# EAGLE board led-er-v2 copy (EAGLE 7.2.0)
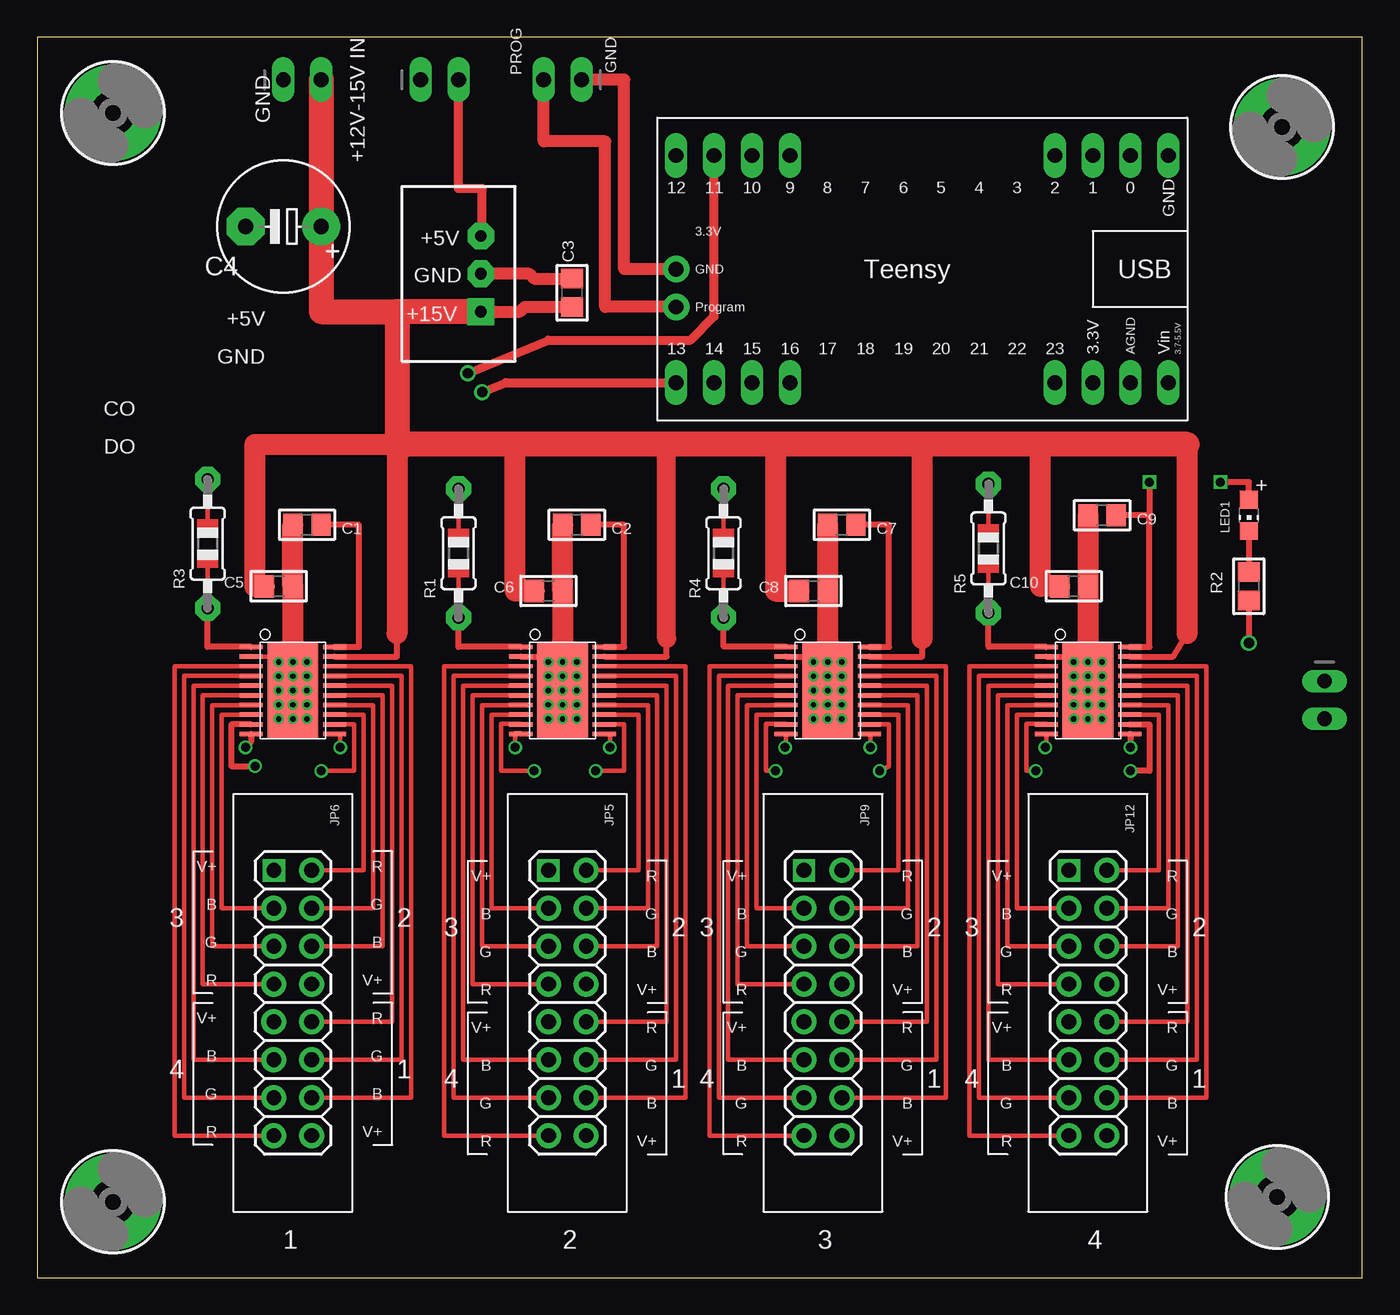
[diagram p0: board, top side]
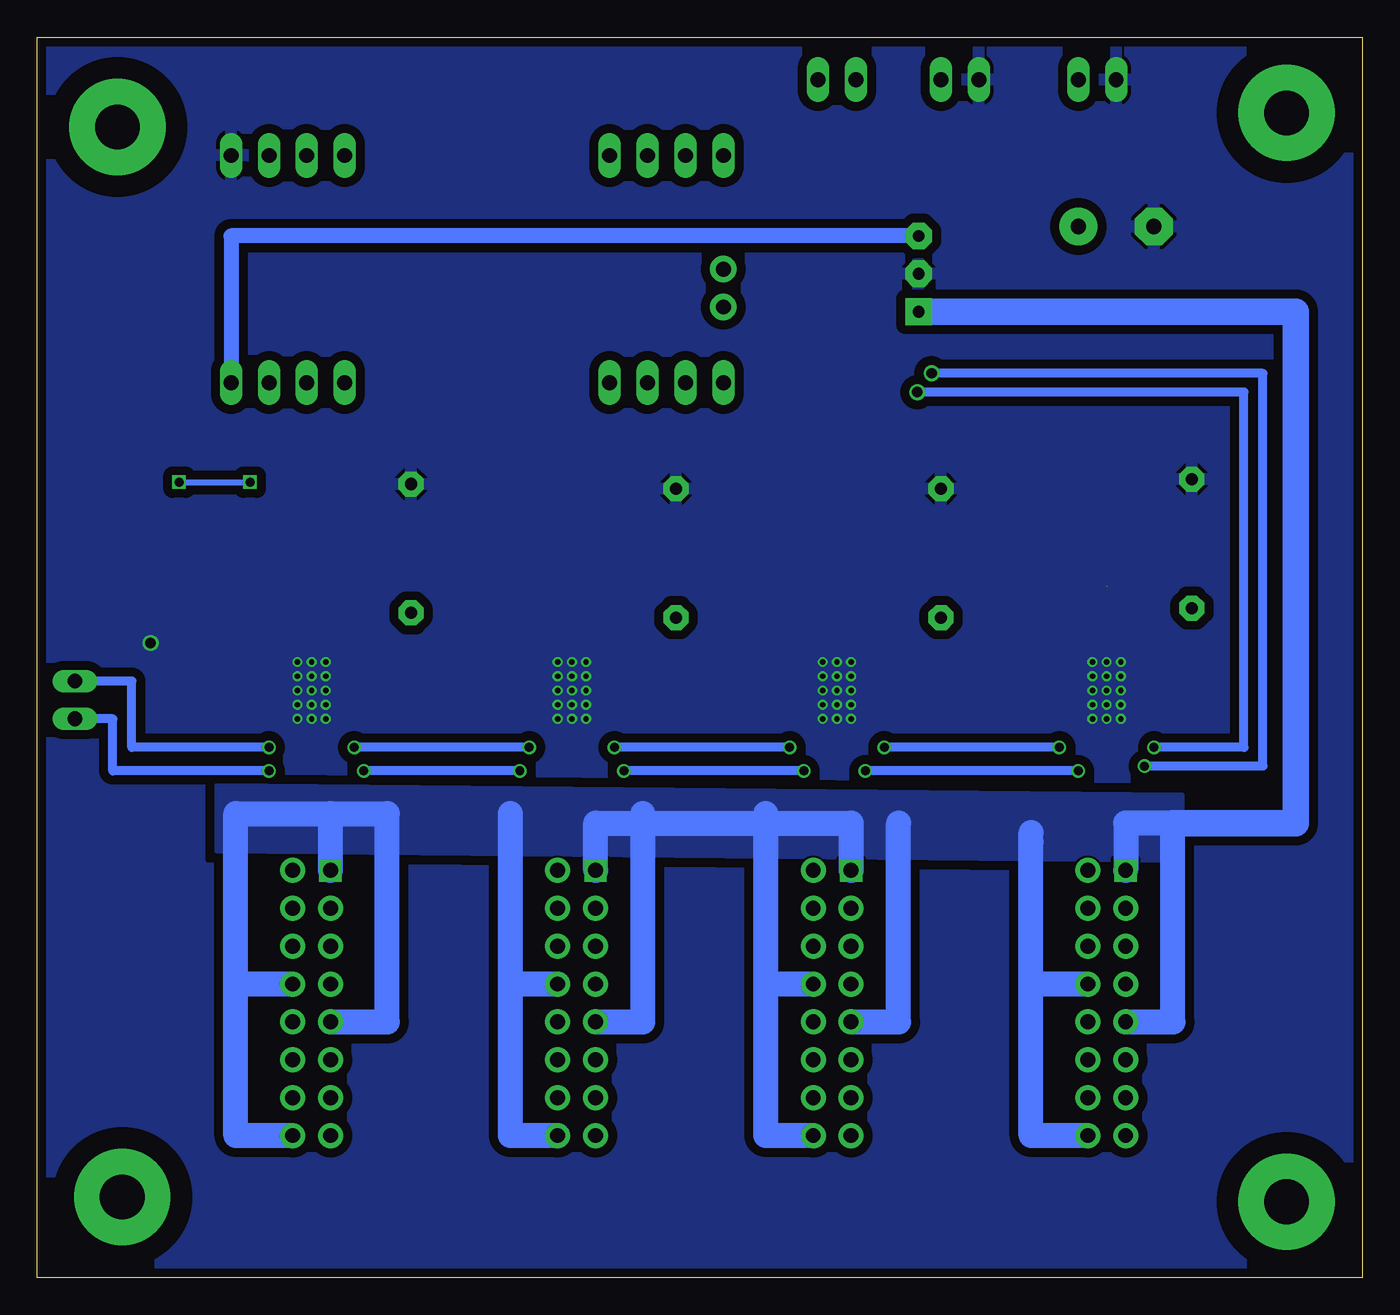
[diagram p1: board, bottom side, seen from below]

Size 88.89 x 83.17 mm. Coordinates in mm from the lower left corner, seen from the top.
Outline: 0,0 88.89,0 88.89,83.17 0,83.17 0,0
Copper layers (1*16): Top 0.035mm / dielectric 1.5mm / Bottom 0.035mm
Design rules "SeeedStudio_2layer_DRU_no_angle_20140221": minimum track width 6mil, minimum drill 12mil, track to track 6mil, track to pad 6mil, pad to pad 6mil, via to via 6mil, smd to smd 0mil, copper to edge 10mil, drill to drill 10mil, minimum pad ring 10mil, minimum via ring 6mil, stop-mask expansion 2mil, vias tented up to drill 100mil, thermal gap 10mil
tRestrict: area 10.8,14 to 16.5,17.8; area 19.7,16.5 to 23.5,20.3; area 28.6,14 to 33.7,17.8; area 38.7,16.5 to 41.9,20.3; area 47.6,14 to 52.1,17.8; area 57.1,16.5 to 61,20.3; area 66,14 to 71.1,17.8; area 75.6,16.5 to 80.6,20.3; area 25.8,10.4 to 26.5,12.7; area 44.3,10.5 to 45.5,12.6; area 63,10.6 to 63.9,12.8; area 15.2,36.6 to 15.8,37.7; 1 more areas

## Footprints (pad centres in the part's own frame; a part is rotated, then mirrored left to right if it is on the bottom)
0805 = smd 1.3 x 1.5: 1 -0.95,0; 2 0.95,0
E5-8,5 = drill 1.016 pad 2.54: + -2.54,0 | drill 1.016 pad 2.54 octagon: - 2.54,0
HTSSOP20DAP = smd 0.3 x 1.55: 1 -2.925,-2.8; 2 -2.275,-2.8; 3 -1.625,-2.8; 4 -0.975,-2.8; 5 -0.325,-2.8; 6 0.325,-2.8; 7 0.975,-2.8; 8 1.625,-2.8; 9 2.275,-2.8; 10 2.925,-2.8; 11 2.925,2.8; 12 2.275,2.8; 13 1.625,2.8; 14 0.975,2.8; 15 0.325,2.8; 16 -0.325,2.8; 17 -0.975,2.8; 18 -1.625,2.8; 19 -2.275,2.8; 20 -2.925,2.8 | smd 6.5 x 3.4: EXP 0,0
2X08 = drill 1 square: P1 -8.89,-1.27 | drill 1 pad 1.676: P2 -6.35,-1.27; P3 -3.81,-1.27; P4 -1.27,-1.27; P5 1.27,-1.27; P6 3.81,-1.27; P7 6.35,-1.27; P8 8.89,-1.27; P9 -8.89,1.27; P10 -6.35,1.27; P11 -3.81,1.27; P12 -1.27,1.27; P13 1.27,1.27; P14 3.81,1.27; P15 6.35,1.27; P16 8.89,1.27
1X02_OVAL = drill 1 long: 1 -1.27,0; 2 1.27,0
CHIP-LED0805 = smd 1.2 x 1.2: A 0,-1.05; C 0,1.05
0805-THM-7 = drill 0.813 pad 1.676 octagon: 1 -4.318,0; 2 4.318,0
TSR-1 = drill 0.8 pad 1.8 square: 1 -2.54,-1.5 | drill 0.8 pad 1.8 octagon: 2 0,-1.5; 3 2.54,-1.5
MOUNTINGHOLE_3.0_PLATED = drill 3 pad 6.452: P$1 0,0
TEENSY_LEDER = drill 1 pad 1.422 long: 0 12.7,7.62; 1 10.16,7.62; 2 7.62,7.62; 3.3V 10.16,-7.62; 9 -10.16,7.62; 10 -12.7,7.62; 11 -15.24,7.62; 12 -17.78,7.62; 13 -17.78,-7.62; 14 -15.24,-7.62; 15 -12.7,-7.62; 16 -10.16,-7.62; 23 7.62,-7.62; AGND 12.7,-7.62; GND 15.24,7.62; VIN 15.24,-7.62 | drill 1 pad 1.778: GND2 -17.78,0; PROG -17.78,-2.54

## Placement (x,y rotation side)
C1  10uF/16V  [0805]  18.1,50.48 180 top
C2  10uF/16V  [0805]  36.2,50.48 180 top
C3  10uF/16V  [0805]  35.88,66.04 90 top
C4  220uF+  [E5-8,5]  16.51,70.48 180 top
C5  1uF/50V  [0805]  16.19,46.35 0 top
C6  1uF/50V  [0805]  34.29,46.04 0 top
C7  10uF/16V  [0805]  53.98,50.48 180 top
C8  1uF/50V  [0805]  52.07,46.04 0 top
C9  10uF/16V  [0805]  71.44,51.12 180 top
C10  1uF/50V  [0805]  69.53,46.35 0 top
IC1  TLC59711  [HTSSOP20DAP]  17.14,39.37 270 top
IC2  TLC59711  [HTSSOP20DAP]  35.24,39.37 270 top
IC3  TLC59711  [HTSSOP20DAP]  53.02,39.37 270 top
IC4  TLC59711  [HTSSOP20DAP]  70.48,39.37 270 top
JP5  [2X08]  35.56,18.41 270 top
JP6  [2X08]  17.14,18.41 270 top
JP9  [2X08]  52.7,18.41 270 top
JP12  [2X08]  70.48,18.41 270 top
JP_5V  [1X02_OVAL]  26.99,80.33 0 top
JP_15VIN  [1X02_OVAL]  17.78,80.33 0 top
JP_15VIN1  [1X02_OVAL]  86.36,38.73 270 top
JP_PROG  [1X02_OVAL]  35.24,80.33 180 top
LED1  Green  [CHIP-LED0805]  81.28,51.12 180 top
R1  3.3K  [0805-THM-7]  28.26,48.58 90 top
R2  470  [0805]  81.28,46.35 90 top
R3  3.3K  [0805-THM-7]  11.43,49.21 90 top
R4  3.3K  [0805-THM-7]  46.04,48.58 90 top
R5  3.3K  [0805-THM-7]  63.82,48.9 90 top
TSR1-2450  TSR1-2450  [TSR-1]  28.26,67.31 90 top
U$1  MOUNTINGHOLE  [MOUNTINGHOLE_3.0_PLATED]  83.5,77.15 0 top
U$2  MOUNTINGHOLE  [MOUNTINGHOLE_3.0_PLATED]  5.08,5.08 0 top
U$3  MOUNTINGHOLE  [MOUNTINGHOLE_3.0_PLATED]  83.19,5.4 0 top
U$4  MOUNTINGHOLE  [MOUNTINGHOLE_3.0_PLATED]  5.08,78.11 0 top
U$5  TEENSY_LEDER  [TEENSY_LEDER]  60.64,67.63 0 top

## Library data of the parts
C1-C3 C5-C10 JP_5V JP_15VIN JP_15VIN1 JP_PROG R2 U$1-U$4 = microbuilder
C4 IC1-IC4 LED1 R1 R3-R5 = adafruit
JP5 JP6 JP9 JP12 U$5 = Andrews
TSR1-2450 = SteelCaveRobotics-Power

## Nets
+15V: C3.1 C4.+ C5.1 C6.1 C8.1 C10.1 IC1.19 IC2.19 IC3.19 IC4.19 JP5.P1 JP5.P5 JP5.P12 JP5.P16 JP6.P1 JP6.P5 JP6.P12 JP6.P16 JP9.P1 JP9.P5 JP9.P12 JP9.P16 JP12.P1 JP12.P5 JP12.P12 JP12.P16 JP_15VIN.2 TSR1-2450.1
GND: C1.2 C2.2 C3.2 C4.- C5.2 C6.2 C7.2 C8.2 C9.2 C10.2 IC1.2 IC1.EXP IC2.2 IC2.EXP IC3.2 IC3.EXP IC4.2 IC4.EXP JP_5V.1 JP_15VIN.1 R1.2 R2.1 R3.2 R4.2 R5.2 TSR1-2450.2 U$5.GND
JP1: JP_5V.2 TSR1-2450.3 U$5.VIN
N$1: LED1.C R2.2
N$2: IC1.1 R3.1
N$3: IC1.3 JP6.P8
N$4: IC1.4 JP6.P7
N$5: IC1.5 JP6.P6
N$6: IC1.6 JP6.P4
N$7: IC1.7 JP6.P3
N$8: IC1.8 JP6.P2
N$9: IC1.13 JP6.P9
N$10: IC1.14 JP6.P10
N$11: IC1.15 JP6.P11
N$12: IC1.16 JP6.P13
N$13: IC1.17 JP6.P14
N$14: IC1.18 JP6.P15
N$15: IC2.1 R1.1
N$16: IC2.3 JP5.P8
N$17: IC2.4 JP5.P7
N$18: IC2.5 JP5.P6
N$19: IC2.6 JP5.P4
N$20: IC2.7 JP5.P3
N$21: IC2.8 JP5.P2
N$22: IC2.13 JP5.P9
N$23: IC2.14 JP5.P10
N$24: IC2.15 JP5.P11
N$25: IC2.16 JP5.P13
N$26: IC2.17 JP5.P14
N$27: IC2.18 JP5.P15
N$28: IC3.1 R4.1
N$29: IC3.3 JP9.P8
N$30: IC3.4 JP9.P7
N$31: IC3.5 JP9.P6
N$32: IC3.6 JP9.P4
N$33: IC3.7 JP9.P3
N$34: IC3.8 JP9.P2
N$35: IC3.13 JP9.P9
N$36: IC3.14 JP9.P10
N$37: IC3.15 JP9.P11
N$38: IC3.16 JP9.P13
N$39: IC3.17 JP9.P14
N$40: IC3.18 JP9.P15
N$41: IC4.1 R5.1
N$42: IC4.3 JP12.P8
N$43: IC4.4 JP12.P7
N$44: IC4.5 JP12.P6
N$45: IC4.6 JP12.P4
N$46: IC4.7 JP12.P3
N$47: IC4.8 JP12.P2
N$48: IC4.13 JP12.P9
N$49: IC4.14 JP12.P10
N$50: IC4.15 JP12.P11
N$51: IC4.16 JP12.P13
N$52: IC4.17 JP12.P14
N$53: IC4.18 JP12.P15
N$54: JP_PROG.1 U$5.GND2
N$55: JP_PROG.2 U$5.PROG
N$56: C1.1 IC1.20
N$57: C7.1 IC3.20
N$58: C2.1 IC2.20
N$59: IC4.11 JP_15VIN1.1
N$60: IC4.12 JP_15VIN1.2
SCKI: IC1.10 U$5.13
SCKO1: IC1.11 IC2.10
SCKO2: IC2.11 IC3.10
SCKO3: IC3.11 IC4.10
SDTI: IC1.9 U$5.11
SDTO1: IC1.12 IC2.9
SDTO2: IC2.12 IC3.9
SDTO3: IC3.12 IC4.9
VCC: C9.1 IC4.20 LED1.A

## Tracks (layer width: path | path; a pad name or v marks a point on that pad's centre or on a via)
+15V
  Top 0.406: IC1.19 24.13,41.65 24.13,43.18 | IC2.19 42.23,41.65 42.23,42.86 | IC3.19 59.37,41.65 59.37,42.86 | IC4.19 76.2,41.65 77.15,43.18
  Top 0.813: 24.13,64.77 32.38,64.77 32.7,65.09 35.24,65.09 C3.1
  Top 1.27: 42.23,42.86 42.23,55.88
  Top 1.422: 24.13,55.88 24.13,43.18 | C10.1 67.31,46.35 67.31,55.88 | 59.05,55.88 49.53,55.88 49.53,46.04 C8.1 | 59.37,42.86 59.37,55.88 | C6.1 32.07,46.04 32.07,55.88 | C5.1 14.61,46.35 14.61,55.88 24.77,55.88 | 77.15,43.18 77.15,55.88
  Top 1.676: 77.15,55.88 67.31,55.88 59.37,55.88 59.05,55.88 42.23,55.88 32.07,55.88 24.77,55.88 24.13,55.88 24.13,64.77 | JP_15VIN.2 C4.+ 19.05,64.77 24.13,64.77 | TSR1-2450.1 24.13,64.77
  Bottom 1.676: JP6.P1 15.88,30.48 12.7,30.48 12.7,17.14 JP6.P5 | JP6.P12 22.23,19.68 22.23,29.21 | JP6.P16 22.23,9.53 22.23,29.84 | JP5.P12 40.01,19.68 | 40.01,19.68 40.01,31.11 | JP5.P16 40.01,9.53 40.01,19.68 | JP5.P5 31.11,17.14 31.11,30.48 | JP9.P12 57.15,19.68 | 57.15,19.68 57.15,31.11 | JP9.P16 57.15,9.53 57.15,19.68 | JP9.P5 48.26,17.14 48.26,31.11 | JP12.P12 75.56,19.68 | 75.56,19.68 75.56,31.11 69.22,31.11 | 69.22,31.11 65.41,31.11 65.41,17.14 JP12.P5 | JP12.P16 75.56,9.53 75.56,19.68 | JP12.P1 69.22,31.11 | JP9.P1 51.44,30.48 34.29,30.48 JP5.P1
  Bottom 1.778: 12.7,30.48 4.45,30.48 4.45,64.77 TSR1-2450.1
  pour Bottom: 12.06,32.38 12.06,27.94 76.83,28.57 76.83,33.02
GND  (via drill 0.36, 0.7)  (1 unrouted)
  Top 0.305: 33.92,41.65 v34.29,41.27 | IC1.2 16.19,41.65 v16.19,41.27
  Top 0.406: IC2.2 33.92,41.65 | R2.1 v81.28,42.55 | IC3.2 52.07,41.65 v52.07,41.27 | IC4.2 69.53,41.65 v69.53,41.27
  Top 0.813: C3.2 35.24,66.99 33.34,66.99 33.02,67.31 TSR1-2450.2
  Top 1.422: v70.48,41.27 C10.2 C9.2 | v53.02,41.27 C8.2 C7.2 | v35.24,41.27 C6.2 C2.2 | v17.14,41.27 C5.2 C1.2
  other vias: 70.48,39.37 71.44,37.47 70.48,37.47 69.53,37.47 71.44,38.42 70.48,38.42 69.53,38.42 71.44,39.37 69.53,39.37 71.44,40.32 70.48,40.32 69.53,40.32 53.02,39.37 53.98,39.37 52.07,39.37 53.98,38.42 53.02,38.42 52.07,38.42 53.98,37.47 53.02,37.47 52.07,37.47 53.98,40.32 53.02,40.32 52.07,40.32 35.24,39.37 36.2,39.37 34.29,39.37 34.29,38.42 35.24,38.42 36.2,38.42 36.2,40.32 35.24,40.32 34.29,40.32 34.29,37.47 35.24,37.47 36.2,37.47 17.14,39.37 16.19,39.37 18.1,39.37 18.1,40.32 17.14,40.32 16.19,40.32 18.1,41.27 18.1,38.42 17.14,38.42 16.19,38.42 16.19,37.47 17.14,37.47 18.1,37.47 36.2,41.27 53.98,41.27 71.44,41.27 69.53,40.32 35.24,40.32
  pour Bottom (isolate 0.61, rank 2): 0,83.19 0,0 88.9,0 88.9,83.19
JP1
  Top 0.61: TSR1-2450.3 29.84,69.85 29.84,73.03 28.26,73.03 JP_5V.2
  Bottom 1.016: TSR1-2450.3 75.88,69.85 U$5.VIN
N$1
  Top 0.406: LED1.C R2.2
N$2
  Top 0.406: IC1.1 11.43,42.3 R3.1
N$3
  Top 0.305: IC1.3 9.21,40.99 9.21,9.53 JP6.P8
N$4
  Top 0.305: IC1.4 9.84,40.34 9.84,12.06 JP6.P7
N$5
  Top 0.305: IC1.5 10.48,39.7 10.48,14.61 JP6.P6
N$6
  Top 0.305: IC1.6 11.11,39.05 11.11,19.68 JP6.P4
N$7
  Top 0.305: IC1.7 11.75,38.4 11.75,22.23 JP6.P3
N$8
  Top 0.305: IC1.8 12.38,37.74 12.38,24.77 JP6.P2
N$9
  Top 0.305: IC1.13 21.91,37.74 21.91,27.3 JP6.P9
N$10
  Top 0.305: IC1.14 22.54,38.4 22.54,24.77 JP6.P10
N$11
  Top 0.305: IC1.15 23.18,39.05 23.18,22.23 JP6.P11
N$12
  Top 0.305: IC1.16 23.81,39.7 23.81,17.14 JP6.P13
N$13
  Top 0.305: IC1.17 24.45,40.34 24.45,14.61 JP6.P14
N$14
  Top 0.305: IC1.18 25.08,40.99 25.08,12.06 JP6.P15
N$15
  Top 0.406: IC2.1 28.26,42.3 R1.1
N$16
  Top 0.305: IC2.3 27.3,40.99 27.3,9.53 JP5.P8
N$17
  Top 0.305: IC2.4 27.94,40.34 27.94,12.06 JP5.P7
N$18
  Top 0.305: IC2.5 28.57,39.7 28.57,14.61 JP5.P6
N$19
  Top 0.305: IC2.6 29.21,39.05 29.21,19.68 JP5.P4
N$20
  Top 0.305: IC2.7 29.84,38.4 29.84,22.23 JP5.P3
N$21
  Top 0.305: IC2.8 30.48,37.74 30.48,24.77 JP5.P2
N$22
  Top 0.305: IC2.13 40.32,37.74 40.32,27.3 JP5.P9
N$23
  Top 0.305: IC2.14 40.96,38.4 40.96,24.77 JP5.P10
N$24
  Top 0.305: IC2.15 41.59,39.05 41.59,22.23 JP5.P11
N$25
  Top 0.305: IC2.16 42.23,39.7 42.23,17.14 JP5.P13
N$26
  Top 0.305: IC2.17 42.86,40.34 42.86,14.61 JP5.P14
N$27
  Top 0.305: IC2.18 43.5,40.99 43.5,12.06 JP5.P15
N$28
  Top 0.305: IC3.1 50.2,42.31
  Top 0.406: 50.2,42.31 46.04,42.31 R4.1
N$29
  Top 0.305: IC3.3 45.09,40.99 45.09,9.53 JP9.P8
N$30
  Top 0.305: IC3.4 45.72,40.34 45.72,12.06 JP9.P7
N$31
  Top 0.305: IC3.5 46.35,39.7 46.35,14.61 JP9.P6
N$32
  Top 0.305: IC3.6 46.99,39.05 46.99,19.68 JP9.P4
N$33
  Top 0.305: IC3.7 47.62,38.4 47.62,22.23 JP9.P3
N$34
  Top 0.305: IC3.8 48.26,37.74 48.26,24.77 JP9.P2
N$35
  Top 0.305: IC3.13 57.78,37.74 57.78,27.3 JP9.P9
N$36
  Top 0.305: IC3.14 58.42,38.4 58.42,24.77 JP9.P10
N$37
  Top 0.305: IC3.15 59.05,39.05 59.05,22.23 JP9.P11
N$38
  Top 0.305: IC3.16 59.69,39.7 59.69,17.14 JP9.P13
N$39
  Top 0.305: IC3.17 60.33,40.34 60.33,14.61 JP9.P14
N$40
  Top 0.305: IC3.18 60.96,40.99 60.96,12.06 JP9.P15
N$41
  Top 0.406: IC4.1 63.82,42.3 R5.1
N$42
  Top 0.305: IC4.3 62.55,40.99 62.55,9.53 JP12.P8
N$43
  Top 0.305: IC4.4 63.18,40.34 63.18,12.06 JP12.P7
N$44
  Top 0.305: IC4.5 63.82,39.7 63.82,14.61 JP12.P6
N$45
  Top 0.305: IC4.6 64.45,39.05 64.45,19.68 JP12.P4
N$46
  Top 0.305: IC4.7 65.09,38.4 65.09,22.23 JP12.P3
N$47
  Top 0.305: IC4.8 65.72,37.74 65.72,24.77 JP12.P2
N$48
  Top 0.305: IC4.13 75.25,37.74 75.25,27.3 JP12.P9
N$49
  Top 0.305: IC4.14 75.88,38.4 75.88,24.77 JP12.P10
N$50
  Top 0.305: IC4.15 76.52,39.05 76.52,22.23 JP12.P11
N$51
  Top 0.305: IC4.16 77.15,39.7 77.15,17.14 JP12.P13
N$52
  Top 0.305: IC4.17 77.79,40.34 77.79,14.61 JP12.P14
N$53
  Top 0.305: IC4.18 78.42,40.99 78.42,12.06 JP12.P15
N$54
  Top 0.813: U$5.GND2 39.37,67.63 39.37,80.33 JP_PROG.1
N$55
  Top 0.813: U$5.PROG 38.1,65.09 38.1,76.2 33.97,76.2 JP_PROG.2
N$56
  Top 0.406: IC1.20 21.59,42.3 21.59,50.48 C1.1
N$57
  Top 0.406: IC3.20 57.15,42.3 57.15,50.48 C7.1
N$58
  Top 0.406: IC2.20 39.37,42.3 39.37,50.48 C2.1
N$59  (via drill 0.6)
  Top 0.406: IC4.11 73.34,36.45 v73.34,35.56
  Bottom 0.61: v73.34,35.56 82.55,35.56 82.55,40.01 JP_15VIN1.1
N$60  (via drill 0.6)
  Top 0.406: IC4.12 74.61,37.09 74.61,33.97 v73.34,33.97
  Bottom 0.61: v73.34,33.97 83.82,33.97 83.82,37.47 JP_15VIN1.2
SCKI  (via drill 0.6, 0.7)
  Top 0.406: IC1.10 14.35,35.94 v13.97,35.56
  Top 0.61: v29.84,59.37 31.43,60.01 U$5.13
  Bottom 0.61: v13.97,35.56 7.94,35.56 7.94,59.37 v29.84,59.37
SCKO1  (via drill 0.6)
  Top 0.305: IC1.11 20.32,36.45 v20.32,35.56 | 32.07,36.45 IC2.10 32.44,36.51 32.07,36.51 v32.07,35.56
  Bottom 0.61: v20.32,35.56 v32.07,35.56
SCKO2  (via drill 0.6)
  Top 0.305: IC2.11 38.42,36.45 v38.42,35.56 | v50.16,35.56 50.22,35.56 IC3.10
  Bottom 0.61: v38.42,35.56 v50.16,35.56
SCKO3  (via drill 0.6)
  Top 0.305: IC3.11 55.88,36.45 v55.88,35.56 | v67.63,35.56 67.69,35.56 IC4.10
  Bottom 0.61: v55.88,35.56 v67.63,35.56
SDTI  (via drill 0.6, 0.7)
  Top 0.406: IC1.9 13.02,37.09 13.02,34.29 v14.61,34.29
  Top 0.61: v28.89,60.64 34.29,62.87 43.81,62.87 45.4,64.45 U$5.11
  Bottom 0.61: v14.61,34.29 6.67,34.29 6.67,60.64 v28.89,60.64
SDTO1  (via drill 0.6)
  Top 0.305: IC1.12 21.27,37.09 21.27,33.97 v19.05,33.97 | v33.34,33.97 31.11,33.97 31.11,37.15 32.44,37.15 IC2.9
  Bottom 0.61: v19.05,33.97 v33.34,33.97
SDTO2  (via drill 0.6)
  Top 0.305: IC2.12 39.37,37.09 39.37,33.97 v37.47,33.97 | v49.53,33.97 48.9,33.97 48.9,37.15 50.22,37.15 IC3.9
  Bottom 0.61: v37.47,33.97 v49.53,33.97
SDTO3  (via drill 0.6)
  Top 0.305: IC3.12 57.15,37.09 57.15,34.29 v56.52,33.97 | v66.99,33.97 66.36,33.97 66.36,37.15 67.69,37.15 IC4.9
  Bottom 0.61: v56.52,33.97 v66.99,33.97
VCC  (via drill 0.6)
  Top 0.406: IC4.20 74.61,42.3 74.61,51.12 | 74.61,51.12 C9.1 | LED1.A 81.28,53.34 v79.38,53.34 | v74.61,53.34 74.61,51.12
  Bottom 0.406: v79.38,53.34 v74.61,53.34

## Text on the board
tPlace: PROG | +12V-15V IN | GND | GND | +5V | GND | +5V | +15V | GND | CO | DO | V+ | R | V+ | R | V+ | R | V+ | R | 3 | B | G | 2 | B | G | B | G | B | G | 3 | 2 | 3 | 2 | 3 | 2 | G | B | G | B | G | B | G | B | R | V+ | R | V+ | R | V+ | R | V+ | V+ | R | V+ | R | V+ | R | V+ | R | 4 | B | G | 1 | B | G | B | G | B | G | 4 | 1 | 4 | 1 | 4 | 1 | G | B | G | B | G | B | G | B | R | V+ | R | V+ | R | V+ | R | V+ | 1 | 2 | 3 | 4